# Altium PCB PCB_RGBlimp-Q.pcbdoc (part 1 of 2)
Units mil, origin at the board's own origin, x right, y up, seen from the top; angles counter-clockwise.
Board outline 4269.68 x 4108.26 mil, 2 copper layers (Top Layer, Bottom Layer); 33 components, 48 nets, 199 pads, 83 vias.
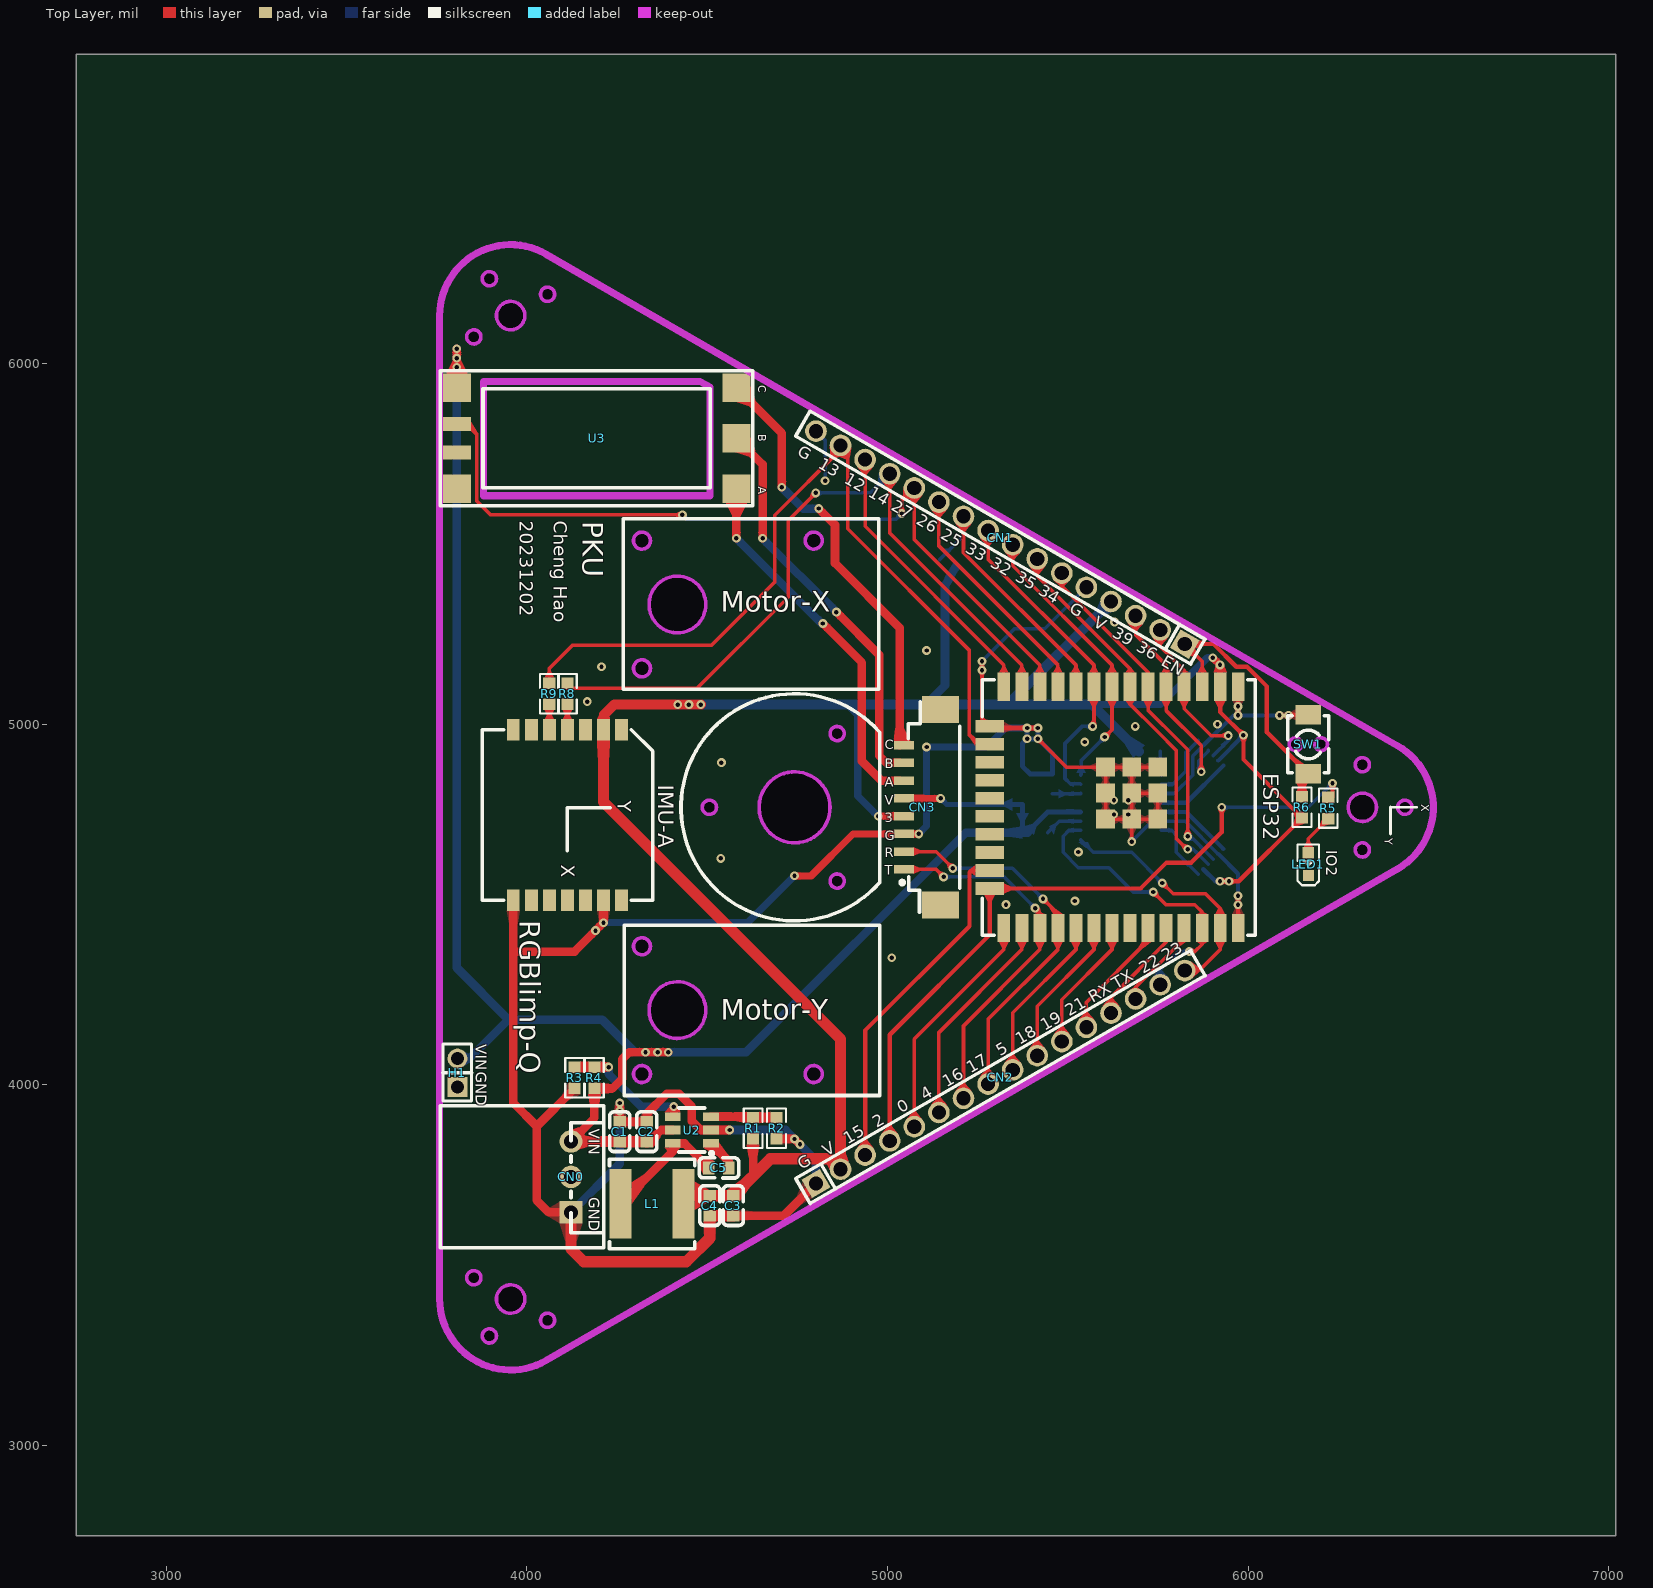
[diagram p0: Top Layer view]
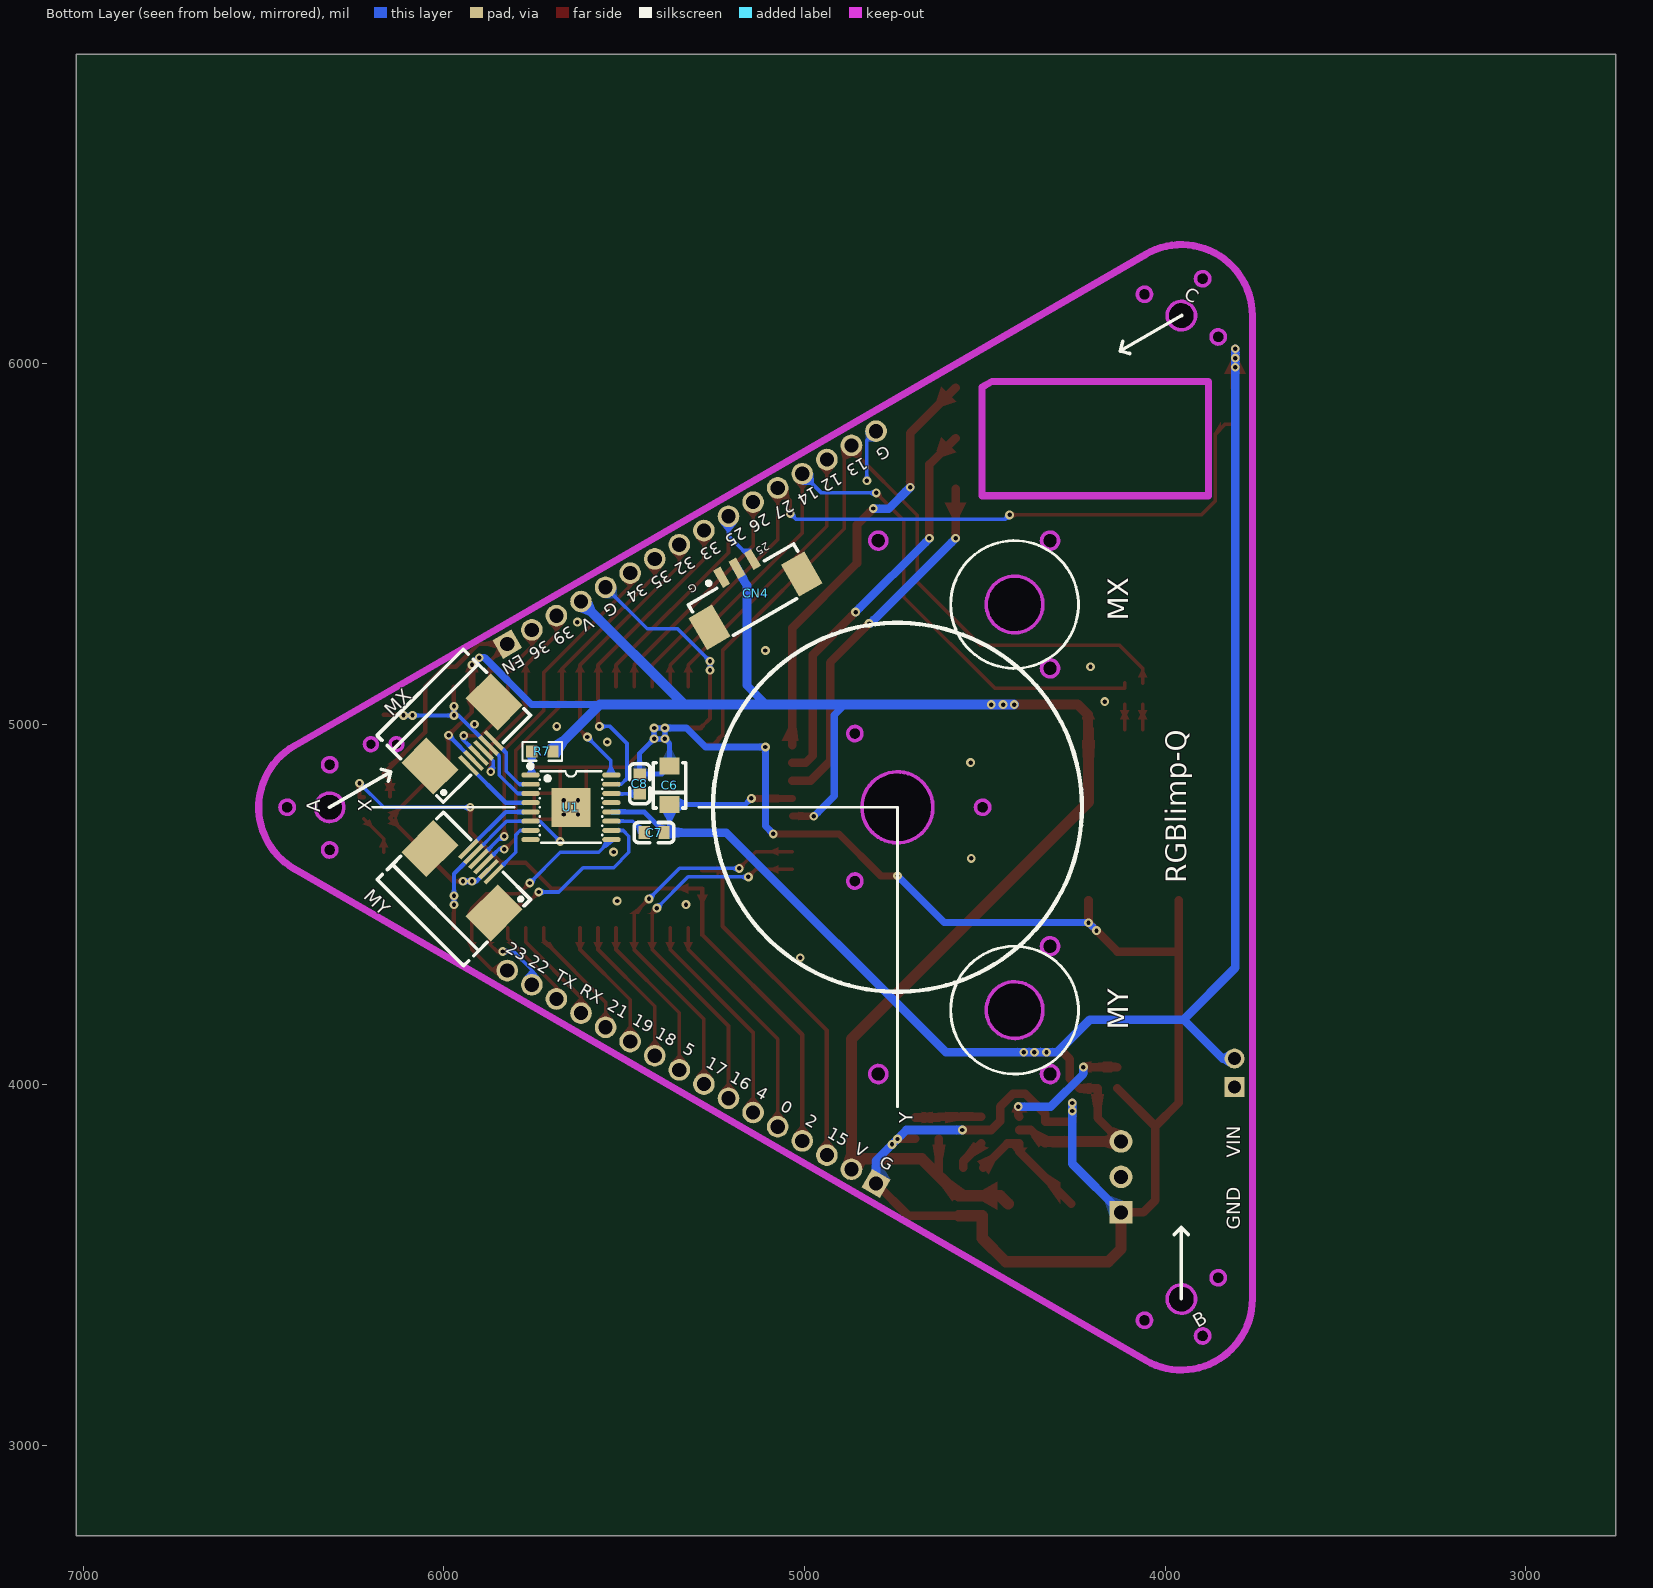
[diagram p1: Bottom Layer view, seen from below]

## Layer stack, top to bottom
Top Layer: signal copper (thickness not stored)
Dielectric: dielectric 12.6, FR-4, Dk 4.8
Bottom Layer: signal copper (thickness not stored)

## Board outline
7019.68,2750 2750,2750 2750,6858.26 7019.68,6858.26
cut-out: 4879.92,4565.11 ccw(c4860.23,4564.87) 4840.55,4565.11 ccw(c4860.23,4565.35)
cut-out: 4879.92,4974.25 ccw(c4860.23,4974.01) 4840.55,4974.25 ccw(c4860.23,4974.49)
cut-out: 4840.55,4769.68 ccw(c4742.12,4769.14) 4643.7,4769.68 ccw(c4742.12,4770.22)
cut-out: 4525.59,4769.68 ccw(c4505.9,4769.44) 4486.22,4769.68 ccw(c4505.9,4769.92)
cut-out: 3994.09,6133.5 ccw(c3954.72,6133.5) 3915.35,6133.5 ccw(c3954.72,6133.5)
cut-out: 3994.09,3405.86 ccw(c3954.72,3405.86) 3915.35,3405.86 ccw(c3954.72,3405.86)
cut-out: 6356.29,4769.68 ccw(c6316.92,4769.68) 6277.55,4769.68 ccw(c6316.92,4769.68)
cut-out: 6336.61,4651.57 ccw(c6316.92,4651.33) 6297.24,4651.57 ccw(c6316.92,4651.81)
cut-out: 3872.12,6074.44 ccw(c3852.43,6074.2) 3832.75,6074.44 ccw(c3852.43,6074.68)
cut-out: 6336.61,4887.79 ccw(c6316.92,4887.55) 6297.24,4887.79 ccw(c6316.92,4888.03)
cut-out: 3872.12,3464.92 ccw(c3852.43,3464.68) 3832.75,3464.92 ccw(c3852.43,3465.16)
cut-out: 4076.7,3346.81 ccw(c4057.01,3346.57) 4037.33,3346.81 ccw(c4057.01,3347.05)
cut-out: 4076.7,6192.55 ccw(c4057.01,6192.31) 4037.33,6192.55 ccw(c4057.01,6192.79)
cut-out: 4496.06,5332.25 ccw(c4417.32,5332.25) 4338.58,5332.25 ccw(c4417.32,5332.25)
cut-out: 4342.51,5155.11 ccw(c4318.89,5155.11) 4295.27,5155.11 ccw(c4318.89,5155.11)
cut-out: 4342.51,5509.44 ccw(c4318.89,5509.44) 4295.27,5509.44 ccw(c4318.89,5509.44)
cut-out: 4818.89,5509.44 ccw(c4795.27,5509.44) 4771.65,5509.44 ccw(c4795.27,5509.44)
cut-out: 4496.06,4207.1 ccw(c4417.32,4207.1) 4338.58,4207.1 ccw(c4417.32,4207.1)
cut-out: 4342.51,4384.25 ccw(c4318.89,4384.25) 4295.27,4384.25 ccw(c4318.89,4384.25)
cut-out: 4342.51,4029.92 ccw(c4318.89,4029.92) 4295.27,4029.92 ccw(c4318.89,4029.92)
cut-out: 4818.89,4029.92 ccw(c4795.27,4029.92) 4771.65,4029.92 ccw(c4795.27,4029.92)
cut-out: 3915.36,6235.82 ccw(c3895.67,6235.58) 3875.99,6235.82 ccw(c3895.67,6236.06)
cut-out: 3915.36,3303.54 ccw(c3895.67,3303.3) 3875.99,3303.54 ccw(c3895.67,3303.78)
cut-out: 6454.72,4769.68 ccw(c6435.03,4769.44) 6415.35,4769.68 ccw(c6435.03,4769.92)

## Design rules (kind name [scope] priority, off if disabled: settings)
Clearance Default [All] p1: gap=7 ignorepadtopadclearanceinfootprint=FALSE except(0: Region-Region; 6: Track-Track Track-SMDPad SMDPad-SMDPad Track-THPad SMDPad-THPad THPad-THPad Track-Via SMDPad-Via THPad-Via Via-Via Track-Fill SMDPad-Fill THPad-Fill Via-Fill Fill-Fill Track-Region SMDPad-Region THPad-Region Via-Region Fill-Region Track-Poly SMDPad-Poly THPad-Poly Via-Poly Fill-Poly Region-Poly Poly-Poly Track-Text SMDPad-Text THPad-Text Via-Text Fill-Text Region-Text Poly-Text Text-Text Track-Sheet SMDPad-Sheet THPad-Sheet Via-Sheet Fill-Sheet Region-Sheet Poly-Sheet Text-Sheet Track-Hole SMDPad-Hole THPad-Hole Via-Hole Fill-Hole Region-Hole Poly-Hole Text-Hole Sheet-Hole)
DiffPairsRouting differentialPair [All] p1: maxuncoupledlength=10 minlimit=6 maxlimit=50 mostfreqgap=6 toplayer_minwidth=5 toplayer_prefwidth=10 toplayer_maxwidth=100 bottomlayer_minwidth=5 bottomlayer_prefwidth=10 bottomlayer_maxwidth=100
PasteMaskExpansion Common [All] p1: expansion=0
PlaneConnect Default [All] p1: planeconnectstyle=Relief reliefexpansion=20 reliefentries=4 reliefconductorwidth=0 reliefairgap=10
PolygonConnect Default [All] p1: connectstyle=Relief reliefentries=4 reliefconductorwidth=0 polygonreliefangle="90 Angle" airgapwidth=10
PolygonConnect gge37914 [All] p1: connectstyle=Relief reliefentries=4 reliefconductorwidth=0 polygonreliefangle="90 Angle" airgapwidth=10
PolygonConnect gge37853 [All] p1: connectstyle=Relief reliefentries=4 reliefconductorwidth=0 polygonreliefangle="90 Angle" airgapwidth=10
RoutingVias Default [All] p1: viastyle="Through Hole" holewidth=12.008 minholewidth=12.008 maxholewidth=2362 width=24.016 minwidth=24.016 maxwidth=3938
SolderMaskExpansion Common [All] p1: useseparateexpansions=TRUE expansion=2 expansionbottom=2
Width Default [All] p1: maxlimit=1000 minlimit=10 preferedwidth=10

## Components (designator, comment, footprint, x,y, rotation, side; value= is the part's Value field where it differs from the comment)
C1 "22uF" C0603 4257.12,3869.68 r270 top
C2 "100nF" C0603 4332.12,3869.68 r270 top
C3 "22uF" C0603 4572.12,3664.68 r270 top
C4 "100nF" C0603 4507.12,3664.68 r270 top
C5 "22nF" C0603 4532.12,3769.68 r180 top
C6 "10uF" CAP-SMD_L3.2-W1.6 5374.01,4830.7 r90 bottom
C7 "10nF" C0603 5417.12,4699.68 r180 bottom
C8 "2.2uF" C0603 5457.12,4834.68 r270 bottom
CN0 "S3B-XH-A (LF)(SN)" CONN-TH_S3B-XH-A-LF-SN-RGBLIMP 4122.08,3744.68 r90 top
CN1 "A2005WV-16P" HDR-TH_16P-P2.00-V-M 5312.99,5517.71 r150 top
CN2 "A2005WV-16P" HDR-TH_16P-P2.00-V-M 5312.99,4021.65 r30 top
CN3 "AFC12-S08CCC-00" CONN-SMD_8P-P1.25-V-M_AFC12-S08CCC-00 5096.43,4769.73 r90 top
CN4 "AFC12-S03CCC-00" CONN-SMD_AFC12-S03CCC-00 5161.41,5387.79 r150 bottom
ESP32 "ESP32-WROOM-32UE(16MB)" WIFI-SMD_ESP32-WROOM-32UE 5627.95,4769.68 r270 top
H1 "A2005WV-2P_C2879963" HDR-TH_2P-P2.00-V-M 3807.09,4033.46 r90 top
IMU-A "HI229" HI229 4112.22,4769.68 r270 top
L1 "10uH" IND-SMD_L6.0-W6.0_SWPA6045S 4347.12,3669.68 r0 top
LED1 "FC-DA1608BK-470H10" LED0603-RD 6167.32,4612.2 r90 top
MX "KH-FG0.5-H2.0-6PIN" FPC-SMD_KH-FG0.5-H2.0-6PIN 5923.22,4946.85 r135 bottom
MY "KH-FG0.5-H2.0-6PIN" FPC-SMD_KH-FG0.5-H2.0-6PIN 5923.22,4592.52 r45 bottom
R1 "68kΩ" R0603 4627.12,3879.68 r90 top
R2 "15kΩ" R0603 4692.12,3879.68 r270 top
R3 "10kΩ" R0603 4132.12,4019.68 r270 top
R4 "20kΩ" R0603 4187.12,4019.68 r270 top
R5 "1kΩ" R0603 6222.43,4767.71 r270 top
R6 "10kΩ" R0603 6149.6,4769.68 r90 top
R7 "47kΩ" R0603 5727.12,4924.68 r0 bottom
R8 "120Ω" R0603 4112.12,5084.68 r270 top
R9 "120Ω" R0603 4062.12,5084.68 r270 top
SW1 "TSA343G00D-250J2" SW-SMD_L4.0-W2.9-P4.15-EH 6167.12,4944.68 r90 top
U1 "DRV8833PWP" TSSOP-16_L5.0-W4.4-P0.65-LS6.4-BL-EP 5647.63,4769.68 r270 bottom
U2 "MT2492" SOT-23-6_L2.9-W1.6-P0.95-LS2.8-BR 4457.12,3874.68 r0 top
U3 "EMAX_ESC_BULLET_6A" EMAX_ESC_BULLET_6A 4625.98,5793.3 r90 top

## Footprints (in the part's own frame and the unit in brackets; to place one, negate y for a bottom-side part, rotate by r counter-clockwise, add the part's x,y. Pads: shape width x height; smd on the part's side, far side on the other; paste and mask are expansions set on the pad)
C0603 [mm]
  rect 0.8x0.9 smd: 1(-0.7,0) 2(0.7,0)
  silkscreen extent -1.41,-0.71 1.39,0.72
CAP-SMD_L3.2-W1.6 [mm]
  rect 1.2x1.4 smd: 1(-1.35,0) 2(1.35,0)
  silkscreen extent -1.6,-1.14 1.6,1.14
CONN-SMD_8P-P1.25-V-M_AFC12-S08CCC-00 [mm]
  rect 0.6x1.4 smd: 1(-4.375,1.297) 2(-3.125,1.297) 3(-1.875,1.297) 4(-0.625,1.297) 5(0.625,1.297) 6(1.875,1.297) 7(3.125,1.297) 8(4.375,1.297)
  rect 1.9x2.6 smd: 9(6.875,-1.297) 10(-6.875,-1.297)
  silkscreen extent -7.4,-2.65 7.45,1.56
CONN-SMD_AFC12-S03CCC-00 [mm]
  rect 0.6x1.4 smd: 1(-1.25,1.309) 2(0,1.309) 3(1.25,1.309)
  rect 1.9x2.6 smd: 4(3.75,-1.309) 5(-3.75,-1.309)
  silkscreen extent -4.25,-2.65 4.32,1.55
CONN-TH_S3B-XH-A-LF-SN-RGBLIMP [mm]
  rect 1.6x1.6 hole 1 copper offset 0.001,0: 1(-2.5,0)
  round 1.6 hole 1: 2(0,0) 3(2.5,0)
  silkscreen extent -5,-2.3 5,9.2
EMAX_ESC_BULLET_6A [mm]
  rect 2x2 smd: A(-3.556,1.143) B(0,1.143) C(3.556,1.143) GND(-3.556,20.828) VIN(3.556,20.828)
  rect 1x2 smd: DGND(-1,20.828) PWM(1,20.828)
  silkscreen extent -4.75,0 4.75,22
FPC-SMD_KH-FG0.5-H2.0-6PIN [mm]
  rect 0.3x1.8 smd: 1(-1.25,-0.95) 2(-0.75,-0.95) 3(-0.25,-0.95) 4(0.25,-0.95) 5(0.75,-0.95) 6(1.25,-0.95)
  rect 2.5x3.2 smd: 7(3.2,0.95) 8(-3.2,0.95)
  silkscreen extent -4.34,-1.53 4.34,5.11
HDR-TH_2P-P2.00-V-M [mm]
  rect 1.4x1.4 hole 0.9: 1(-1,0)
  round 1.4 hole 0.9: 2(1,0)
  silkscreen extent -1.99,-1 2.02,1.03
HDR-TH_16P-P2.00-V-M [mil]
  rect 60x60 hole 39.37: 1(-590.55,0)
  round 60 hole 39.37: 2(-511.81,0) 3(-433.07,0) 4(-354.33,0) 5(-275.59,0) 6(-196.85,0) 7(-118.11,0) 8(-39.37,0) 9(39.37,0) 13(354.33,0) 14(433.07,0) 15(511.81,0) 16(590.55,0)
  round 60 hole 39.37 copper offset 0.01,0: 10(118.11,0)
  round 60 hole 39.37 copper offset 0.01,0.01: 11(196.85,0)
  round 60 hole 39.37 copper offset 0,0.01: 12(275.59,0)
  silkscreen extent -633,-40 633,40
HI229 [mm]
  rect 1.5x0.9 smd: 1(-5.461,3.81) 2(-5.461,2.54) 3(-5.461,1.27) 4(-5.461,0) 5(-5.461,-1.27) 6(-5.461,-2.54) 7(-5.461,-3.81) 8(6.539,-3.81) 9(6.539,-2.54) 10(6.539,-1.27) 11(6.539,0) 12(6.539,1.27) 13(6.539,2.54) 14(6.539,3.81)
  silkscreen extent -5.46,-6 6.54,6
IND-SMD_L6.0-W6.0_SWPA6045S [mm]
  rect 1.55x4.9 smd: 1(-2.225,0) 2(2.225,0)
  silkscreen extent -3,-3.15 3,3.15
LED0603-RD [mm]
  rect 0.8x0.8 smd: 1(-0.799,-0.003) 2(0.799,0.003)
  silkscreen extent -1.49,-0.75 1.39,0.76
R0603 [mil]
  rect 31.75x34.02 smd: 1(-29.66,0) 2(29.66,0)
  silkscreen extent -55,-26 55,26
SOT-23-6_L2.9-W1.6-P0.95-LS2.8-BR [mm]
  rect 1.1x0.6 smd: 1(1.35,-0.95) 2(1.35,0) 3(1.35,0.95) 4(-1.35,0.95) 5(-1.35,0) 6(-1.35,-0.95)
  silkscreen extent -0.9,-1.78 1.52,1.55
SW-SMD_L4.0-W2.9-P4.15-EH [mm]
  rect 1.35x1.8 smd: 1(-2.075,0) 2(2.075,0)
  Multi-Layer board cut-out: 0,0.45 0.222,0.513 0.383,0.677 0.442,0.9 0.383,1.123 0.222,1.287 0,1.35 0,1.35 -0.222,1.287 -0.383,1.123 -0.442,0.9 -0.383,0.677 -0.222,0.513 0,0.45
  Multi-Layer board cut-out: 0,-1.35 0.222,-1.287 0.383,-1.123 0.442,-0.9 0.383,-0.677 0.222,-0.513 0,-0.45 0,-0.45 -0.222,-0.513 -0.383,-0.677 -0.442,-0.9 -0.383,-1.123 -0.222,-1.287 0,-1.35
  Multi-Layer keep-out circle w0.254: c0,0.9 r0.45
  Multi-Layer keep-out circle w0.254: c0,-0.9 r0.45
  silkscreen extent -2,-1.45 2,1.45
TSSOP-16_L5.0-W4.4-P0.65-LS6.4-BL-EP [mm]
  oval 0.35x1.3 smd: 1(-2.275,-2.85) 2(-1.625,-2.85) 3(-0.975,-2.85) 4(-0.325,-2.85) 5(0.325,-2.85) 6(0.975,-2.85) 7(1.625,-2.85) 8(2.275,-2.85) 9(2.275,2.85) 10(1.625,2.85) 11(0.975,2.85) 12(0.325,2.85) 13(-0.325,2.85) 14(-0.975,2.85) 15(-1.625,2.85) 16(-2.275,2.85)
  rect 2.74x2.74 smd: 17(0,0)
  silkscreen extent -3.05,-3.01 2.5,2.2
WIFI-SMD_ESP32-WROOM-32UE [mm]
  rect 2x0.9 smd: 1(-8.5,8.755) 2(-8.5,7.485) 3(-8.5,6.215) 4(-8.5,4.945) 5(-8.5,3.675) 6(-8.5,2.405) 7(-8.5,1.135) 8(-8.5,-0.135) 9(-8.5,-1.405) 10(-8.5,-2.675) 11(-8.5,-3.945) 12(-8.5,-5.215) 13(-8.5,-6.485) 14(-8.5,-7.755) 25(8.5,-7.755) 26(8.5,-6.485) 27(8.5,-5.215) 28(8.5,-3.945) 29(8.5,-2.675) 30(8.5,-1.405) 31(8.5,-0.135) 32(8.5,1.135) 33(8.5,2.405) 34(8.5,3.675) 35(8.5,4.945) 36(8.5,6.215) 37(8.5,7.485) 38(8.5,8.755)
  rect 0.9x2 smd: 15(-5.715,-8.755) 16(-4.445,-8.755) 17(-3.175,-8.755) 18(-1.905,-8.755) 19(-0.635,-8.755) 20(0.635,-8.755) 21(1.905,-8.755) 22(3.175,-8.755) 23(4.445,-8.755) 24(5.715,-8.755)
  rect 1.33x1.33 smd: 39(-2.835,3.09) 39(-2.835,1.255) 39(-2.835,-0.58) 39(-1,3.09) 39(-1,1.255) 39(-1,-0.58) 39(0.835,3.09) 39(0.835,1.255) 39(0.835,-0.58)
  silkscreen extent -9,-9.27 9.02,9.95

## Via types
v1: diameter 24.41, hole 12.2, Top Layer to Bottom Layer, 79 vias
v2: diameter 24, hole 12, Top Layer to Bottom Layer, 4 vias

## Nets (pads, with @x,y where several pads share a name; then routed paths per layer and width w, separated by ;. In a path a pad name is that pad's centre, name@x,y a point inside that pad or via, vN(x,y) a via of type N, cw(c..) or ccw(c..) an arc to the next point about the centre after c; other vN are vias at no path point)
3V3: C3.1 C4.1 CN1.4 CN2.2 CN3.4 CN4.2 ESP32.2 IMU-A.2 L1.2 MX.2 MY.2 R1.1 R6.1 R7.1 | length 6616.1
  Top Layer w11.81: v1(5922.12,4564.68) v1(5947.12,4564.68) 5974.22,4564.68 R6.1@6149.6,4740.02 5987.12,4902.48 v1(5987.12,4969.68) 5922.62,5034.18 ESP32.2@5922.62,5104.38
  Top Layer w19.68: v1(4974.4,4745.07) CN3.4@5033.62,4745.08 ; v1(5902.12,5184.68) v1(5922.12,5164.68) 5922.12,5104.88 ESP32.2@5922.62,5104.38
  Top Layer w23.62: C3.1@4572.12,3692.28 4627.12,3747.28 R1.1@4627.12,3850.02
  Top Layer w27.56: IMU-A.2@4214.22,4964.68 4214.22,5026.78 4242.12,5054.68 v1(4418.23,5054.68) ; v1(4418.23,5054.68) v1(4482.12,5054.68)
  Top Layer w31.5: IMU-A.2@4212.22,4984.68 4212.22,4784.58 4869.72,4127.08 4869.72,3765.78 4840.82,3794.68 4674.52,3794.68 4572.12,3692.28 4507.12,3692.28 4457.32,3692.28 L1.2@4434.72,3669.68
  Bottom Layer w11.81: MY.2@5875.9,4598.09 5909.32,4564.68 v1(5922.12,4564.68) v1(5947.12,4564.68) ; MX.2@5917.62,4899.48 v1(5987.12,4969.68)
  Bottom Layer w19.68: 4888.42,5054.68 4917.32,5025.78 4917.32,4801.18 v1@4974.42,4744.08 ; 5488.82,5054.68 5757.02,5054.68 5887.02,5184.68 v1(5902.12,5184.68) ; v1(5902.12,5184.68) v1(5922.12,5164.68) v1(5902.12,5184.68)
  Bottom Layer w23.62: 5106.42,5054.88 5159.42,5107.88 5159.42,5385.78 CN4.2@5187.18,5432.41
  Bottom Layer w27.56: v1@4419.32,5055.08 5567.42,5054.68 R7.1@5697.42,4924.68 ; 5333.32,5054.68 CN1.4@5619.82,5340.58
  other v1: 4449.14,5054.68
3V3EN: R3.1 R4.1 U2.4 | length 360.4
  Top Layer w23.62: R3.1@4132.12,4049.38 4187.12,4049.38 4187.32,4049.18 v1(4226.37,4049.21) ; U2.4@4403.97,3912.08 4407.12,3915.18 v1(4407.12,3939.68)
  Bottom Layer w23.62: v1(4226.37,4049.21) 4226.37,4030.43 4317.12,3939.68 v1(4407.12,3939.68)
3V3FB: R1.2 R2.1 U2.3 | length 184.6
  Top Layer w23.62: U2.3@4510.22,3912.08 4627.12,3912.08 4627.12,3909.38 R2.1@4692.12,3909.38
BLA: CN3.6 U3.A | length 1028.9
  Top Layer w23.62: v1@4581.02,5515.78 U3.A@4580.98,5653.3 ; v1@4820.82,5279.48 4929.12,5171.28 4929.12,4897.68 4983.22,4843.48 CN3.6@5033.62,4843.48
  Bottom Layer w23.62: v1(4580.98,5515.74) 4817.2,5279.52 v1(4820.86,5279.52)
BLB: CN3.7 U3.B | length 1109.4
  Top Layer w23.62: U3.B@4580.98,5793.3 4653.52,5720.78 v1@4653.52,5515.78 ; v1@4858.22,5310.98 4976.42,5192.88 4976.42,4913.38 4997.02,4892.68 CN3.7@5033.62,4892.68
  Bottom Layer w23.62: v1(4653.54,5515.74) v1(4858.26,5311.02)
BLC: CN3.8 U3.C | length 1204.1
  Top Layer w23.62: U3.C@4580.98,5933.3 4706.72,5807.58 v1(4706.69,5657.47) ; v1@4809.02,5598.38 4854.32,5553.08 4854.32,5446.88 5033.62,5267.58 CN3.8@5033.62,4941.98
  Bottom Layer w23.62: v1(4706.69,5657.47) 4765.74,5598.42 v1(4809.05,5598.42)
EN: CN1.1 ESP32.3 R6.2 SW1.1 | length 774.6
  Top Layer w10: CN1.1@5824.42,5222.44 5872.62,5174.18 ESP32.3@5872.62,5104.38
  Top Layer w11.81: CN1.1@5824.42,5222.48 5904.32,5222.48 5967.12,5159.68 5997.12,5159.68 6052.12,5104.68 6052.12,4977.98 SW1.1@6167.12,4862.99 6149.62,4845.48 R6.2@6149.62,4799.38
GND: C1.1 C2.1 C3.2 C4.2 C6.2 C8.1 CN0.1 CN1.5 CN1.16 CN2.1 CN3.3 CN4.1 ESP32.1 ESP32.15 ESP32.38 ESP32.39 H1.1 IMU-A.8 IMU-A.13 LED1.1 MX.5 MY.5 R2.2 R3.2 SW1.2 U1.3 U1.6 U1.13 U1.17 U2.2 U3.DGND U3.GND | length 8742.3
  Top Layer w10: v1(5262.12,5174.68) v1(5262.12,5149.68) 5262.12,5015.78 ESP32.15@5283.22,4994.68 ; v1(5417.12,4959.68) 5495.52,4881.28 ESP32.39@5605.11,4881.29 ; v1(5677.12,4674.68) ESP32.39@5677.32,4736.78 ; ESP32.39@5749.6,4881.29 ESP32.39@5677.32,4881.28 ; ESP32.39@5605.11,4881.29 ESP32.39@5677.32,4881.28 ; ESP32.39@5605.11,4881.29 ESP32.39@5605.11,4809.05 ESP32.39@5605.11,4736.81 ESP32.39@5677.32,4736.78 ; ESP32.39@5677.32,4736.78 ESP32.39@5749.6,4736.81 ESP32.39@5749.6,4809.05 ESP32.39@5677.32,4809.08 ; ESP32.39@5677.32,4736.78 ESP32.39@5677.32,4809.08 ; ESP32.39@5677.32,4809.08 ESP32.39@5677.32,4881.28
  Top Layer w11.81: v1(5972.12,4524.68) ESP32.38@5972.63,4435.03 ; v1(5972.12,5024.68) ESP32.1@5972.62,5104.38 ; v1(6087.12,5024.68) v1(6112.12,5024.68) 6113.82,5026.38 SW1.2@6167.12,5026.37
  Top Layer w13.78: ESP32.15@5283.22,4994.68 5288.22,4989.68 v1(5387.12,4989.68) v1(5417.12,4989.68)
  Top Layer w19.68: v1(4742.12,4579.68) 4788.32,4579.68 4904.52,4695.88 5033.62,4695.88 v1(5086.61,4695.86)
  Top Layer w23.62: 3962.22,4370.78 3962.22,4369.68 4132.12,4369.68 v1(4190.1,4427.66) v1(4212.22,4449.78) IMU-A.13@4212.22,4512.28 ; IMU-A.8@3962.22,4512.28 3962.22,3949.88 4027.12,3884.98 ; CN0.1@4122.12,3646.28 4060.42,3646.28 4027.12,3679.58 4027.12,3884.98 ; R3.2@4132.12,3990.02 4027.12,3884.98 ; v1(4257.12,3927.51) v1(4257.12,3949.68) 4257.12,3897.28 4332.12,3897.28 4332.12,3919.68 4387.12,3974.68 4422.12,3974.68 4457.12,3939.68 4457.12,3899.68 4482.12,3874.68 4510.22,3874.68 v1(4562.12,3874.68) ; C3.2@4572.12,3637.12 4712.32,3637.08 CN2.1@4801.52,3726.38 ; R2.2@4692.12,3850.02 4741.82,3849.98 v1(4742.12,3849.68) v1(4757.12,3834.68)
  Top Layer w31.5: CN0.1@4122.12,3646.28 4122.12,3544.68 4157.12,3509.68 4442.12,3509.68 4507.12,3574.68 C4.2@4507.12,3637.12 C3.2@4572.12,3637.12
  Bottom Layer w10: CN1.16@4801.52,5812.98 4826.77,5787.73 v1(4826.77,5675.19) ; v1(5262.12,5149.68) v1(5262.12,5174.68) 5352.12,5264.68 5436.42,5264.68 CN1.5@5551.62,5379.88 ; v1(5677.12,4674.68) 5733.72,4731.28 U1.6@5759.84,4731.29 5826.22,4731.28 MY.5@5917.62,4639.88 ; U1.3@5759.84,4808.07 5795.52,4808.08 5846.42,4858.98 5846.42,4911.78 MX.5@5875.9,4941.28
  Bottom Layer w11.81: MX.5@5875.9,4941.28 5959.32,5024.68 v1(5972.12,5024.68) ; MY.5@5917.62,4639.88 5972.12,4585.38 v1(5972.12,4499.68) ; v1(5972.12,5049.68) v1(5972.12,5024.68) ; v1(6112.12,5024.68) v1(5972.12,5024.68)
  Bottom Layer w13.78: v1(5387.12,4959.68) 5374.02,4946.58 C6.2@5374.01,4883.86 5395.62,4862.28 5457.12,4862.28 5457.12,4919.68 v1(5417.12,4959.68) ; v1(5387.12,4959.68) v1(5417.12,4959.68) ; v1(5387.12,4959.68) v1(5387.12,4989.68) v1(5417.12,4989.68) v1(5417.12,4959.68)
  Bottom Layer w19.68: v1(4190.1,4427.66) v1(4212.22,4449.78) 4612.22,4449.78 v1(4742.12,4579.68) ; v1(5086.61,4695.86) 5108.26,4717.52 v1(5108.26,4937) 5274.44,4937 5327.12,4989.68 v1(5387.12,4989.68)
  Bottom Layer w23.62: CN0.1@4122.12,3646.28 4257.12,3781.28 v1(4257.12,3949.68) ; v1(4562.12,3874.68) 4717.12,3874.68 v1(4757.12,3834.68) v1(4742.12,3849.68) 4801.52,3790.28 CN2.1@4801.52,3726.38
  other v1: 5011.81,4352.36 5328.73,4499.99 5519.68,4509.84 4537.4,4627.95 5529.52,4645.66 4539.37,4893.69 5547.24,4950.78 5687,4994.09 5915.35,4999.99 4167.32,5062.99 4206.69,5159.44 5108.26,5204.72 5629.91,5283.46
IMU-A_4: IMU-A.4 R8.2 | length 70.3
  Top Layer w10: R8.2@4112.12,5055.02 IMU-A.4@4112.22,4984.68
IMU-A_5: IMU-A.5 R9.2 | length 70.3
  Top Layer w10: R9.2@4062.12,5055.02 IMU-A.5@4062.22,4984.68
IO0: CN2.5 ESP32.25 | length 653.9
  Top Layer w10: CN2.5@5074.32,3883.86 5074.32,4126.88 5322.62,4375.18 ESP32.25@5322.63,4435.03
IO2: CN2.4 ESP32.24 R5.1 | length 1978.2
  Top Layer w11.81: CN2.4@5006.12,3844.49 5006.12,4138.68 5283.22,4415.78 5283.22,4544.68 5702.12,4544.68 5773.62,4616.18 5842.52,4616.18 5927.12,4700.78 v1@5927.12,4769.68 ; R5.1@6222.43,4797.37 6234.22,4797.38 v1(6234.24,4836.61)
  Bottom Layer w10: v1(5927.16,4769.68) 6167.31,4769.68 v1(6234.24,4836.61)
IO4: CN2.6 ESP32.26 | length 607.1
  Top Layer w10: CN2.6@5142.51,3923.23 5142.52,4145.08 5372.62,4375.18 ESP32.26@5372.63,4435.03
IO5: CN2.9 ESP32.29 | length 466.3
  Top Layer w10: CN2.9@5347.12,4041.38 5347.12,4199.68 5522.62,4375.18 ESP32.29@5522.63,4435.03
IO12: CN1.14 ESP32.14 | length 789.2
  Top Layer w10: CN1.14@4937.92,5734.28 4937.92,5548.88 5322.62,5164.18 ESP32.14@5322.62,5104.38
IO13: CN1.15 ESP32.16 R9.1 | length 2237.6
  Top Layer w10: R9.1@4062.12,5114.38 4062.12,5154.68 4127.12,5219.68 4512.12,5219.68 4687.12,5394.68 4687.12,5579.68 4869.72,5762.28 CN1.15@4869.75,5773.62 4889.72,5753.58 4889.72,5542.08 5227.12,5204.68 5227.12,4969.68 5252.12,4944.68 ESP32.16@5283.22,4944.68
IO14: CN1.13 ESP32.13 R8.1 | length 2022.1
  Top Layer w10: R8.1@4112.12,5114.38 4112.12,5099.68 4471.72,5099.68 4724.42,5352.38 4724.42,5564.98 v1(4801.18,5641.72) ; CN1.13@5006.13,5694.88 5006.12,5530.68 5372.62,5164.18 ESP32.13@5372.62,5104.38
  Bottom Layer w10: v1(4801.18,5641.72) 4952.97,5641.72 CN1.13@5006.13,5694.88
IO15: CN2.3 ESP32.23 | length 962.6
  Top Layer w11.81: CN2.3@4937.93,3805.12 4937.92,4150.48 5227.12,4439.68 5227.12,4589.68 5232.12,4594.68 ESP32.23@5283.22,4594.68
IO16: CN2.7 CN3.1 ESP32.27 | length 1041.1
  Top Layer w10: CN3.1@5033.62,4597.48 5134.82,4597.48 v1(5155.51,4576.77) ; CN2.7@5210.7,3962.6 5210.72,4163.28 5422.62,4375.18 ESP32.27@5422.63,4435.03 5422.62,4476.98 v1(5409.44,4490.15)
  Bottom Layer w10: v1(5155.51,4576.77) 5322.83,4576.77 v1(5409.44,4490.15)
IO17: CN2.8 CN3.2 ESP32.28 | length 1062.9
  Top Layer w10: CN3.2@5033.62,4646.68 5134.82,4646.68 v1(5181.1,4600.39) ; CN2.8@5278.89,4001.97 5278.92,4181.48 5472.62,4375.18 ESP32.28@5472.63,4435.03 5472.62,4474.18 v1@5431.12,4515.78
  Bottom Layer w10: v1(5181.1,4600.39) 5346.46,4600.38 v1(5431.1,4515.74)
IO18: CN2.10 ESP32.30 | length 419.5
  Top Layer w10: CN2.10@5415.27,4080.71 5415.32,4217.88 5572.62,4375.18 ESP32.30@5572.63,4435.03
IO19: CN2.11 ESP32.31 | length 372.6
  Top Layer w10: CN2.11@5483.42,4120.08 5483.42,4235.98 5622.62,4375.18 ESP32.31@5622.63,4435.03
IO21: CN2.12 ESP32.33 | length 346.3
  Top Layer w10: CN2.12@5551.62,4159.48 5551.62,4229.18 5722.62,4400.18 ESP32.33@5722.63,4435.03
IO22: CN2.15 ESP32.36 U1.10 | length 830.2
  Top Layer w10: v1(5737.12,4534.68) 5772.12,4499.68 5852.12,4499.68 5872.62,4479.18 ESP32.36@5872.63,4435.03 5872.62,4390.18 5852.12,4369.68 v1(5837.12,4369.68)
  Bottom Layer w10: U1.10@5535.43,4705.7 5503.12,4705.68 5487.12,4689.68 5487.12,4644.68 5529.42,4602.38 5614.12,4602.38 5681.82,4534.68 v1(5737.12,4534.68) ; CN2.15@5756.23,4277.56 5756.22,4318.78 5807.12,4369.68 v1(5837.12,4369.68)
IO23: CN2.16 ESP32.37 U1.9 | length 702.6
  Top Layer w10: v1(5762.12,4559.68) 5792.12,4529.68 5882.12,4529.68 5922.62,4489.18 ESP32.37@5922.63,4435.03 5922.62,4375.18 5867.12,4319.68 5827.12,4319.68 CN2.16@5824.42,4316.98
  Bottom Layer w10: U1.9@5535.43,4680.11 5570.82,4644.68 5677.12,4644.68 v1(5762.12,4559.68)
IO25: CN1.10 CN4.3 ESP32.10 | length 748.8
  Top Layer w10: CN1.10@5210.7,5576.76 5210.72,5476.08 5522.62,5164.18 ESP32.10@5522.62,5104.38
  Bottom Layer w10: CN4.3@5144.52,5456.98 5210.72,5523.18 CN1.10@5210.7,5576.76
IO26: CN1.11 ESP32.11 | length 648.5
  Top Layer w10: CN1.11@5142.52,5616.18 5142.52,5494.28 5472.62,5164.18 ESP32.11@5472.62,5104.38
IO27: CN1.12 ESP32.12 U3.PWM | length 2238.2
  Top Layer w10: U3.PWM@3805.98,5832.67 3832.72,5832.68 3860.22,5805.08 3860.22,5620.08 3899.62,5580.68 v1(4431.1,5580.7) ; v1(5039.36,5584.64) 5039.36,5620.54 CN1.12@5074.32,5655.51 5074.32,5512.48 5422.62,5164.18 ESP32.12@5422.62,5104.38
  Bottom Layer w10: v1(4431.1,5580.7) 4442.92,5568.88 5023.52,5568.88 v1@5039.32,5584.68
IO32: CN1.8 ESP32.8 U1.16 | length 788.9
  Top Layer w10: CN1.8@5347.08,5498.03 5347.12,5439.68 5622.62,5164.18 5622.62,5104.38 5622.62,4985.18 v1(5602.12,4964.68)
  Bottom Layer w10: U1.16@5535.43,4859.25 5537.12,4860.98 5537.12,4899.68 v1(5602.12,4964.68)
IO33: CN1.9 ESP32.9 U1.15 | length 910
  Top Layer w10: CN1.9@5278.89,5537.4 5278.92,5457.88 5572.62,5164.18 5572.62,5104.38 5572.62,4997.78 v1(5568.89,4994.09)
  Bottom Layer w10: U1.15@5535.43,4833.66 5534.42,4834.68 5507.12,4834.68 5492.12,4849.68 5492.12,4914.68 5492.12,4946.88 5539.32,4994.08 v1(5568.89,4994.09)
IO34: CN1.6 ESP32.6 MY.4 | length 972.1
  Top Layer w10: CN1.6@5483.42,5419.28 5483.42,5383.38 5722.62,5144.18 5722.62,5104.38 5722.62,5039.18 5765.72,4996.08 ; 5765.74,4996.06 5832.67,4929.13 v1(5832.67,4688.97)
  Bottom Layer w10: v1(5832.67,4688.97) 5840.72,4688.98 MY.4@5903.74,4625.93
IO35: CN1.7 ESP32.7 MY.3 | length 1053.5
  Top Layer w10: CN1.7@5415.27,5458.66 5415.32,5411.48 5672.62,5154.18 5672.62,5104.38 5672.62,5055.68 5748.02,4980.28 5801.18,4927.16 5801.18,4683.07 5830.7,4653.54 v1(5832.67,4653.54)
  Bottom Layer w10: v1@5832.72,4653.58 5848.22,4653.58 MY.3@5889.82,4612.01
IO36: CN1.2 ESP32.4 MX.3 | length 471.3
  Top Layer w10: CN1.2@5756.23,5261.8 5756.22,5215.58 5822.62,5149.18 5822.62,5104.38 5822.62,5043.48 5897.62,4968.48 v1(5944.92,4968.5)
  Bottom Layer w10: MX.3@5903.72,4913.48 5944.92,4954.68 v1(5944.92,4968.5)
IO39: CN1.3 ESP32.5 MX.4 | length 581.7
  Top Layer w10: CN1.3@5688.04,5301.17 5688.02,5248.78 5772.62,5164.18 5772.62,5104.38 5772.62,5038.38 5870.02,4940.98 v1@5870.02,4868.08
  Bottom Layer w10: 5863.12,4898.58 5889.82,4925.28 MX.4@5889.81,4927.36 ; 5863.17,4898.61 5863.17,4875.01 v1(5870.07,4868.1)
L1_1: C5.2 L1.1 U2.6 | length 356
  Top Layer w23.62: L1.1@4259.52,3669.68 4404.02,3814.18 U2.6@4403.97,3837.28 4436.92,3837.28 C5.2@4504.52,3769.68
MX_M+: MX.6 U1.2 | length 182.2
  Bottom Layer w10: U1.2@5759.84,4833.66 5791.12,4833.68 5827.12,4869.68 5827.12,4920.38 MX.6@5861.98,4955.2
MX_M-: MX.1 U1.4 | length 215
  Bottom Layer w11.81: U1.4@5759.32,4782.48 5828.42,4782.48 MX.1@5931.57,4885.6
MY_M+: MY.1 U1.7 | length 180.6
  Bottom Layer w10: U1.7@5759.84,4705.7 5788.42,4705.68 5801.22,4692.88 5801.22,4644.98 MY.1@5861.98,4584.17
MY_M-: MY.6 U1.5 | length 214.9
  Bottom Layer w11.81: U1.5@5759.32,4756.88 5828.42,4756.88 MY.6@5931.52,4653.78
N/C: IMU-A.7
R5_2: LED1.2 R5.2 | length 115.3
  Top Layer w10: LED1.2@6167.12,4645.68 6167.12,4682.78 R5.2@6222.43,4738.05
U0_RXD: CN2.13 ESP32.34 | length 299.5
  Top Layer w10: CN2.13@5619.84,4198.82 5619.82,4242.38 5772.62,4395.18 ESP32.34@5772.63,4435.03
U0_TXD: CN2.14 ESP32.35 | length 252.6
  Top Layer w10: CN2.14@5688.03,4238.19 5688.02,4270.58 5822.62,4405.18 ESP32.35@5822.63,4435.03
U1_1: R7.2 U1.1 | length 66.6
  Bottom Layer w10: R7.2@5756.78,4924.68 5756.82,4862.28 U1.1@5759.84,4859.25
U1_11: C7.1 U1.11 | length 103.8
  Bottom Layer w10: C7.1@5444.68,4699.68 5476.32,4731.28 U1.11@5535.43,4731.29
U1_14: C8.2 U1.14 | length 78.7
  Bottom Layer w10: C8.2@5457.12,4807.12 5534.42,4807.08 U1.14@5535.43,4808.07
U2_1: C5.1 U2.1 | length 88.1
  Top Layer w23.62: U2.1@4510.22,3837.28 4559.72,3787.88 C5.1@4559.68,3769.68
VIN: C1.2 C2.2 C6.1 C7.2 CN0.3 CN3.5 H1.2 R4.2 U1.12 U2.5 U3.VIN | length 5358.3
  Top Layer w19.68: CN3.5@5033.62,4794.28 v1(5147.12,4794.29)
  Top Layer w23.62: v1@3805.12,6041.38 U3.VIN@3805.98,5933.3 ; CN0.3@4122.08,3843.11 4187.12,3908.18 R4.2@4187.12,3990.02 4237.42,3989.98 4263.82,4016.38 4263.82,4070.88 4283.42,4090.58 v1(4391.9,4090.58) ; C2.2@4332.12,3842.12 4339.52,3842.08 4372.12,3874.68 U2.5@4403.97,3874.68
  Top Layer w31.5: CN0.3@4122.08,3843.11 C2.2@4332.12,3842.12
  Bottom Layer w13.78: v1(5147.12,4794.29) 5163.82,4777.58 C6.1@5374.01,4777.55 5374.02,4715.28 5389.52,4699.68 5389.52,4702.08 5444.32,4756.88 U1.12@5535.43,4756.88
  Bottom Layer w23.62: v1(3805.11,6041.33) 3805.11,4324.81 3948.82,4180.68 4208.66,4180.68 4299.12,4090.55 v1(4391.9,4090.58) ; H1.2@3807.08,4072.83 3840.55,4072.83 3948.82,4181.1 ; v1(4328.74,4090.55) v1(4362.2,4090.55) ; v1(4362.2,4090.55) v1(4391.9,4090.58) ; C7.2@5389.52,4699.68 5217.42,4699.68 4608.32,4090.58 v1(4391.9,4090.58)
  other v1: 3805.11,5990.15 3805.11,6015.74
pads on no net: CN0.2 CN3.9 CN3.10 CN4.4 CN4.5 ESP32.17 ESP32.18 ESP32.19 ESP32.20 ESP32.21 ESP32.22 ESP32.32 IMU-A.1 IMU-A.3 IMU-A.6 IMU-A.9 IMU-A.10 IMU-A.11 IMU-A.12 IMU-A.14 MX.7 MX.8 MY.7 MY.8 U1.8
copper on no net:
  other v2: 5627.95,4749.99 5667.32,4749.99 5627.95,4789.36 5667.32,4789.36

## Polygon pours and split planes (outlines as drawn)
GND on Top Layer (solid, remove dead copper, pour order 0): 3003.94,6608.26 6763.77,6608.26 6763.77,3013.78 6769.68,3007.87 3013.78,3007.87 3003.94,3017.72 3003.94,4978.34
GND on Bottom Layer (solid, remove dead copper, pour order 2): 3000,6600.39 6757.87,6600.39 6761.8,6604.32 6761.8,3003.94 3009.84,3003.94 3005.91,3000

## Keep-outs
Board Outline Layer:
  lines w19.68: 3757.87,3405.87 3757.87,6133.5 cw(c3954.72,6133.5) 4053.15,6303.98 4053.15,6303.97 6415.35,4940.16 ; 3757.87,3405.87 3757.87,3405.86 ; 3757.87,3405.87 ccw(c3954.72,3405.87) 4053.15,3235.39 ; 4053.15,3235.39 4053.15,3235.39 ; 4053.15,3235.39 6415.35,4599.2 ccw(c6316.92,4769.68) 6415.35,4940.16 ; 6415.35,4940.16 6415.35,4940.16 ; 3879.92,5633.88 4507.87,5633.88 4507.87,5935.03 4480.31,5950.78 3879.92,5950.78 3879.92,5633.88
Multi-Layer:
  circle w10: c4860.23,4565.11 r19.68
  circle w10: c4860.23,4974.25 r19.68
  circle w10: c4742.12,4769.68 r98.42
  circle w10: c4505.9,4769.68 r19.68
  circle w10: c3954.72,6133.5 r39.37
  circle w10: c3954.72,3405.86 r39.37
  circle w10: c6316.92,4769.68 r39.37
  circle w10: c6316.92,4651.57 r19.68
  circle w10: c3852.43,6074.44 r19.68
  circle w10: c6316.92,4887.79 r19.68
  circle w10: c3852.43,3464.92 r19.68
  circle w10: c4057.01,3346.81 r19.68
  circle w10: c4057.01,6192.55 r19.68
  circle w10: c4417.32,5332.25 r78.74
  circle w10: c4318.89,5155.11 r23.62
  circle w10: c4318.89,5509.44 r23.62
  circle w10: c4795.27,5509.44 r23.62
  circle w10: c4417.32,4207.1 r78.74
  circle w10: c4318.89,4384.25 r23.62
  circle w10: c4318.89,4029.92 r23.62
  circle w10: c4795.27,4029.92 r23.62
  circle w10: c3895.67,6235.82 r19.68
  circle w10: c3895.67,3303.54 r19.68
  circle w10: c6435.03,4769.68 r19.68

## Other copper
Top Layer:
  region net VIN: 4120.12,3874.54 4153.52,3841.12 4160.76,3865.06 4144.06,3881.77
  region net VIN: 4143.04,3866.62 4142.79,3819.37 4164.88,3827.13 4165.04,3858.63
  region net IO13: 4899.07,5767.31 4859.82,5745.3 4884.72,5735.19 4894.72,5740.79
  region net IO13: 4877.45,5744.62 4840.01,5769.59 4842.83,5742.47 4851.32,5736.81
  region net IO12: 4960.43,5714.39 4915.43,5714.4 4932.92,5693.4 4942.92,5693.4
  region net IO14: 5028.62,5675.03 4983.62,5675.03 5001.12,5654.03 5011.12,5654.03
  region net IO27: 5096.82,5635.66 5051.82,5635.66 5069.32,5614.66 5079.32,5614.66
  region net IO27: 5044.38,5657.38 5076.2,5625.56 5048.98,5623.09 5041.91,5630.16
  region net IO26: 5165.01,5596.3 5120.01,5596.28 5137.52,5575.29 5147.52,5575.29
  region net IO25: 5233.21,5556.94 5188.21,5556.9 5205.72,5535.92 5215.72,5535.92
  region net IO33: 5301.41,5517.56 5256.41,5517.53 5273.92,5496.55 5283.92,5496.55
  region net IO32: 5369.6,5478.2 5324.6,5478.16 5342.12,5457.17 5352.12,5457.18
  region net IO35: 5437.8,5438.84 5392.8,5438.78 5410.32,5417.8 5420.32,5417.81
  region net IO34: 5505.94,5399.41 5460.94,5399.46 5478.42,5383.39 5488.42,5383.38
  region net IO39: 5710.53,5281.32 5665.53,5281.33 5683.02,5260.33 5693.02,5260.33
  region net IO36: 5778.72,5241.96 5733.72,5241.96 5751.22,5220.96 5761.22,5220.96
  region net U0_TXD: 5710.53,4258.05 5665.53,4258.02 5683.02,4270.58 5693.02,4270.59
  region net U0_RXD: 5642.34,4218.68 5597.34,4218.65 5614.82,4239.66 5624.82,4239.67
  region net IO21: 5574.14,4179.31 5529.14,4179.28 5546.62,4200.29 5556.62,4200.3
  region net IO19: 5505.95,4139.95 5460.95,4139.9 5478.42,4160.92 5488.42,4160.93
  region net IO18: 5437.8,4100.53 5392.8,4100.58 5410.32,4121.56 5420.32,4121.55
  region net IO5: 5369.6,4061.16 5324.6,4061.21 5342.12,4082.19 5352.12,4082.18
  region net IO17: 5301.41,4021.8 5256.41,4021.83 5273.92,4042.82 5283.92,4042.81
  region net IO16: 5233.21,3982.43 5188.21,3982.46 5205.72,4003.45 5215.72,4003.44
  region net IO4: 5165.02,3943.07 5120.02,3943.08 5137.52,3964.08 5147.52,3964.07
  region net IO0: 5096.82,3903.7 5051.82,3903.7 5069.32,3924.7 5079.32,3924.7
  region net IO2: 5028.63,3864.34 4983.63,3864.33 5000.22,3885.33 5012.03,3885.34
  region net IO15: 4960.43,3824.98 4915.43,3824.95 4932.02,3845.96 4943.83,3845.97
  region net 3V3: 4839.81,3763.87 4871.63,3795.69 4852.01,3805.77 4829.74,3783.5
  region net 3V3: 4892.24,3785.61 4847.24,3785.58 4853.97,3806.58 4885.47,3806.61
  region net IO23: 5845.73,4295.82 5842.71,4340.72 5864.84,4324.68 5865.51,4314.68
  region net 3V3: 5987.89,4981.86 5974.94,4968.92 5971.2,4977.26 5979.55,4985.61
  region net 3V3: 5977.97,4961.61 5996.28,4961.61 5993.03,4953.07 5981.22,4953.07
  region net 3V3: 5912.97,5156.61 5931.28,5156.61 5931.96,5148.07 5912.28,5148.07
  region net 3V3: 5922.89,5176.86 5909.94,5163.92 5903.41,5169.47 5917.33,5183.39
  region net 3V3: 5914.3,5185.45 5901.36,5172.5 5906.91,5165.97 5920.83,5179.89
  region net 3V3: 5930.19,4555.53 5930.19,4573.84 5938.74,4570.59 5938.74,4558.78
  region net 3V3: 5939.05,4555.53 5939.05,4573.84 5930.51,4570.59 5930.51,4558.78
  region net 3V3: 5955.19,4555.53 5955.19,4573.84 5963.74,4570.59 5963.74,4558.78
  region net IO2: 5936.3,4761.59 5917.99,4761.63 5921.22,4753.08 5933.03,4753.05
  region net IO2: 6243.39,4828.53 6225.08,4828.55 6228.32,4820 6240.13,4819.99
  region net VIN: 4370.29,4081.41 4370.26,4099.72 4378.8,4102.39 4378.84,4078.77
  region net VIN: 4354.15,4099.72 4354.11,4081.41 4345.56,4078.77 4345.61,4102.39
  region net VIN: 4336.83,4081.41 4336.8,4099.72 4345.34,4102.39 4345.38,4078.77
  region net VIN: 4320.69,4099.72 4320.65,4081.41 4312.1,4078.77 4312.15,4102.39
  region net 3V3EN: 4397.97,3931.61 4416.28,3931.61 4418.93,3923.07 4395.31,3923.07
  region net 3V3EN: 4218.32,4040.04 4218.28,4058.35 4209.74,4060.99 4209.78,4037.37
  region net IO22: 5845.19,4360.53 5845.19,4378.84 5852.12,4374.68 5852.12,4364.68
  region net IO14: 4801.98,5629.54 4789,5642.45 4785.92,5633.47 4793.01,5626.42
  region net IO33: 5561.78,5004.01 5579.62,4999.9 5577.62,5009.13 5567.62,5011.44
  region net IO32: 5614.3,4963.92 5601.36,4976.86 5610.34,4979.97 5617.41,4972.9
  region net IO23: 5774.3,4560.45 5761.36,4547.5 5770.34,4544.4 5777.41,4551.47
  region net IO22: 5749.3,4535.45 5736.36,4522.5 5745.34,4519.4 5752.41,4526.47
  region net VIN: 5139.05,4785.13 5139.04,4803.44 5130.5,4804.12 5130.51,4784.44
  region net 3V3: 4982.48,4735.92 4982.47,4754.23 4991.01,4754.92 4991.02,4735.24
  region net VIN: 3814.44,6007.87 3796.14,6007.47 3793.66,5998.87 3817.28,5999.39
  region net VIN: 3814.31,6023.77 3796,6023.86 3793.39,6032.42 3817.01,6032.3
  region net VIN: 3814.54,5982.4 3796.24,5981.77 3793.88,5973.14 3817.49,5973.95
  region net VIN: 3814.41,5998.06 3796.11,5998.39 3793.6,6006.98 3817.22,6006.56
  region net IO27: 4423.04,5571.54 4423.02,5589.85 4414.48,5585.68 4414.49,5575.68
  region net IO27: 5030.21,5592.72 5048.52,5592.72 5044.36,5601.26 5034.36,5601.26
  region net BLC: 4821.24,5599.15 4808.25,5586.24 4812.39,5578.31 4829.14,5594.96
  region net BLB: 4870.45,5311.75 4857.46,5298.84 4861.6,5290.91 4878.35,5307.56
  region net BLA: 4833.05,5280.25 4820.06,5267.34 4824.2,5259.41 4840.95,5276.07
  region net BLA: 4590.15,5523.79 4571.85,5523.84 4569.21,5532.39 4592.83,5532.33
  region net BLB: 4662.69,5523.83 4644.38,5523.8 4641.71,5532.34 4665.33,5532.37
  region net BLC: 4715.86,5665.53 4697.55,5665.56 4694.91,5674.11 4718.53,5674.07
  region net IO17: 5181.87,4612.57 5168.92,4599.63 5165.82,4608.61 5172.89,4615.68
  region net IO16: 5156.29,4588.95 5143.33,4576.02 5140.23,4585 5147.31,4592.06
  region net IO16: 5421.62,4490.92 5408.68,4477.97 5417.66,4474.87 5424.73,4481.95
  region net IO17: 5443.28,4516.52 5430.35,4503.56 5439.34,4500.47 5446.4,4507.55
  region net IO36: 5936.86,4959.34 5936.83,4977.65 5928.3,4973.48 5928.31,4963.48
  region net IO39: 5879.2,4876.2 5860.89,4876.15 5865.02,4884.7 5875.02,4884.73
  region net IO34: 5823.52,4697.04 5841.83,4697.04 5837.67,4705.59 5827.67,4705.59
  region net IO35: 5832.41,4665.74 5820.6,4651.76 5816.74,4660.43 5823.22,4668.1
  region net VIN: 3814.34,6033.34 3796.03,6033.18 3793.45,6024.61 3817.07,6024.82
  region net VIN: 4383.83,4081.43 4383.83,4099.74 4375.29,4102.39 4375.29,4078.77
  region net R5_2: 6154.62,4659.42 6179.62,4659.42 6172.12,4674.42 6162.12,4674.42
  region net BLC: 5017.81,4953.79 5063.15,4953.79 5045.43,4989.22 5021.81,4989.22
  region net VIN: 5072.93,4806.15 5072.93,4782.53 5102.46,4784.44 5102.46,4804.12
  region net 3V3: 5017.81,4733.31 5017.81,4756.93 4988.29,4754.92 4988.29,4735.24
  region net IO17: 5072.93,4658.51 5072.93,4634.89 5087.93,4641.68 5087.93,4651.68
  region net IO16: 5072.93,4609.3 5072.93,4585.68 5087.93,4592.48 5087.93,4602.48
  region net BLA: 4610.55,5613.93 4551.49,5613.93 4569.21,5578.5 4592.83,5578.5
  region net BLB: 4620.35,5795.74 4578.64,5753.93 4616.2,5741.4 4632.88,5758.13
  region net BLC: 4620.35,5935.74 4578.64,5893.93 4616.2,5881.4 4632.88,5898.13
  region net VIN: 3776.17,5972.67 3835.22,5972.67 3817.21,6008.11 3793.59,6008.11
  region net IO27: 3845.35,5837.99 3845.24,5812.99 3860.17,5798.05 3860.23,5812.15
  region net VIN: 4314.4,3826.37 4336.6,3857.87 4278.95,3858.08 4256.83,3826.69
  region net VIN: 4323.15,3857.87 4349.84,3826.37 4370.7,3856.56 4355.38,3874.65
  region net 3V3: 4554.4,3707.99 4589.84,3676.49 4617.36,3715.24 4593.77,3736.21
  region net 3V3: 4554.4,3707.99 4589.84,3676.49 4606.04,3709.5 4588.36,3725.22
  region net L1_1: 4488.81,3751.96 4520.31,3787.4 4487.31,3803.6 4471.58,3785.92
  region net U2_1: 4543.93,3787.4 4575.43,3787.4 4571.53,3787.88 4547.91,3787.88
  region net EN: 5865.42,5233.38 5851.73,5209.7 5876.17,5216.58 5883,5228.39
  region net EN: 5852.63,5211.25 5840.12,5189.61 5854.76,5184.97 5859.94,5193.93
  region net EN: 6131.69,4889.56 6155.3,4889.56 6131.18,4907.28 6114.47,4907.28
  region net EN: 6164.39,4836.41 6134.86,4836.41 6143.72,4818.7 6155.53,4818.7
  region net 3V3: 4194.5,5014.21 4229.94,5014.21 4228,5026.78 4200.44,5026.78
  region net 3V3: 4229.94,4955.15 4194.5,4955.15 4196.47,4907.91 4227.97,4907.91
  region net IMU-A_4: 4099.68,5014.21 4124.68,5014.21 4117.16,5029.21 4107.16,5029.21
  region net IMU-A_5: 4049.68,5014.21 4074.68,5014.21 4067.16,5029.21 4057.16,5029.21
  region net 3V3FB: 4531.93,3923.89 4531.93,3900.27 4567.36,3900.27 4567.36,3923.89
  region net U2_1: 4531.93,3840.17 4488.62,3825.47 4529.07,3801.78 4554.02,3810.25
  region net L1_1: 4425.62,3825.47 4382.32,3825.47 4392.21,3814.18 4415.83,3814.18
  region net L1_1: 4425.62,3849.09 4425.62,3825.47 4436.92,3825.47 4436.92,3849.09
  region net VIN: 4382.32,3862.87 4382.32,3886.49 4372.12,3886.49 4372.12,3862.87
  region net 3V3EN: 4382.32,3923.89 4425.62,3923.89 4418.93,3939.68 4395.31,3939.68
  region net 3V3: 5904.92,5143.7 5940.35,5143.7 5931.96,5164.68 5912.28,5164.68
  region net 3V3: 5937.38,5064.96 5907.86,5064.96 5916.71,5047.24 5928.53,5047.24
  region net EN: 5860.12,5143.7 5885.12,5143.7 5877.62,5158.7 5867.62,5158.7
  region net IO36: 5810.12,5143.7 5835.12,5143.7 5827.62,5149.18 5817.62,5149.18
  region net IO36: 5835.12,5064.96 5810.12,5064.96 5817.62,5049.96 5827.62,5049.96
  region net IO39: 5760.12,5143.7 5785.12,5143.7 5777.62,5158.7 5767.62,5158.7
  region net IO39: 5785.12,5064.96 5760.12,5064.96 5767.62,5049.96 5777.62,5049.96
  region net IO34: 5710.12,5143.7 5735.12,5143.7 5727.62,5144.18 5717.62,5144.18
  region net IO34: 5735.12,5064.96 5710.12,5064.96 5717.62,5049.96 5727.62,5049.96
  region net IO35: 5660.12,5143.7 5685.12,5143.7 5677.62,5154.18 5667.62,5154.18
  region net IO35: 5685.12,5064.96 5660.12,5064.96 5667.62,5055.68 5677.62,5055.68
  region net IO32: 5635.12,5064.96 5610.12,5064.96 5617.62,5049.96 5627.62,5049.96
  region net IO32: 5610.12,5143.7 5635.12,5143.7 5627.62,5158.7 5617.62,5158.7
  region net IO33: 5560.12,5143.7 5585.12,5143.7 5577.62,5158.7 5567.62,5158.7
  region net IO33: 5585.12,5064.96 5560.12,5064.96 5567.62,5049.96 5577.62,5049.96
  region net IO25: 5510.12,5143.7 5535.12,5143.7 5527.62,5158.7 5517.62,5158.7
  region net IO26: 5460.12,5143.7 5485.12,5143.7 5477.62,5158.7 5467.62,5158.7
  region net IO27: 5410.12,5143.7 5435.12,5143.7 5427.62,5158.7 5417.62,5158.7
  region net IO14: 5360.12,5143.7 5385.12,5143.7 5377.62,5158.7 5367.62,5158.7
  region net IO12: 5310.12,5143.7 5335.12,5143.7 5327.62,5158.7 5317.62,5158.7
  region net IO13: 5243.89,4940.41 5243.89,4962.4 5228.89,4974.98 5228.89,4960.84
  region net IO15: 5243.89,4579.92 5243.89,4609.45 5232.12,4600.59 5232.12,4588.78
  region net IO2: 5297.99,4526.96 5268.46,4526.96 5277.32,4509.25 5289.13,4509.25
  region net IO2: 5322.63,4559.45 5322.63,4529.92 5340.35,4538.78 5340.35,4550.59
  region net IO0: 5335.12,4395.67 5310.12,4395.67 5317.62,4380.67 5327.62,4380.67
  region net IO4: 5385.12,4395.67 5360.12,4395.67 5367.62,4380.67 5377.62,4380.67
  region net IO16: 5435.12,4395.67 5410.12,4395.67 5417.62,4380.67 5427.62,4380.67
  region net IO16: 5410.12,4474.41 5435.12,4474.41 5427.62,4476.98 5417.62,4476.98
  region net IO17: 5485.12,4395.67 5460.12,4395.67 5467.62,4380.67 5477.62,4380.67
  region net IO17: 5459.9,4474.41 5484.9,4474.41 5464.5,4489.41 5450.37,4489.41
  region net IO5: 5535.12,4395.67 5510.12,4395.67 5517.62,4380.67 5527.62,4380.67
  region net IO18: 5585.12,4395.67 5560.12,4395.67 5567.62,4380.67 5577.62,4380.67
  region net IO19: 5635.12,4395.67 5610.12,4395.67 5617.62,4380.67 5627.62,4380.67
  region net IO21: 5730.6,4395.67 5705.6,4395.67 5696.03,4380.67 5710.18,4380.67
  region net U0_RXD: 5785.12,4395.67 5760.12,4395.67 5767.62,4395.18 5777.62,4395.18
  region net U0_TXD: 5825.6,4395.67 5804.92,4395.67 5791.03,4380.67 5805.17,4380.67
  region net IO22: 5860.12,4474.41 5885.12,4474.41 5877.62,4479.18 5867.62,4479.18
  region net IO22: 5885.12,4395.67 5860.12,4395.67 5867.62,4390.18 5877.62,4390.18
  region net IO23: 5910.12,4474.41 5935.12,4474.41 5927.62,4489.18 5917.62,4489.18
  region net IO23: 5935.12,4395.67 5910.12,4395.67 5917.62,4380.67 5927.62,4380.67
  region net 3V3FB: 4610.12,3893.46 4610.12,3925.21 4574.68,3923.89 4574.68,3900.27
  region net 3V3FB: 4644.13,3925.21 4644.13,3893.46 4679.56,3897.57 4679.56,3921.19
  region net 3V3: 4610.12,3834.15 4644.13,3834.15 4638.93,3798.72 4615.31,3798.72
  region net 3V3FB: 4675.12,3925.21 4675.12,3893.46 4639.68,3897.57 4639.68,3921.19
  region net 3V3EN: 4149.13,4033.46 4149.13,4065.21 4184.56,4061.19 4184.56,4037.57
  region net VIN: 4204.13,3974.15 4170.12,3974.15 4175.31,3938.72 4198.93,3938.72
  region net VIN: 4204.13,4005.9 4204.13,3974.15 4237.42,3978.17 4237.42,4001.79
  region net 3V3EN: 4204.13,4033.46 4204.13,4065.21 4226.42,4060.99 4226.42,4037.37
  region net 3V3EN: 4170.12,4065.21 4170.12,4033.46 4134.68,4037.57 4134.68,4061.19
  region net R5_2: 6225.6,4722.18 6205.43,4736.95 6199.77,4722.5 6207.93,4716.53
  region net EN: 6134.86,4815.21 6164.39,4815.21 6155.53,4832.93 6143.72,4832.93
  region net 3V3: 6132.59,4737.96 6156.04,4755.9 6135.48,4762.48 6126.02,4755.24
  region net 3V3: 6156.21,4724.15 6132.59,4741.87 6125.97,4724.69 6135.51,4717.53
  region net L1_1: 4290.04,3729.72 4290.04,3670.67 4325.47,3718.93 4325.47,3752.33
  region net 3V3: 4465.23,3731.65 4465.23,3652.91 4507.12,3676.53 4507.12,3708.03
  region net IMU-A_4: 4124.64,5039.15 4099.64,5039.15 4107.17,5024.15 4117.17,5024.15
  region net IMU-A_5: 4074.64,5039.15 4049.64,5039.15 4057.17,5024.15 4067.17,5024.15
  region net IO13: 4074.62,5130.21 4049.62,5130.21 4057.12,5145.21 4067.12,5145.21
Bottom Layer:
  region net VIN: 3825.31,4052.16 3825.31,4093.5 3840.55,4084.64 3840.55,4061.02
  region net IO14: 4976.18,5696.75 5008,5664.93 4980.78,5662.46 4973.7,5669.53
  region net IO25: 5233.19,5556.92 5188.19,5556.92 5205.69,5535.92 5215.69,5535.92
  region net 3V3: 5589.9,5342.48 5621.66,5310.6 5600.62,5301.96 5581.18,5321.49
  region net IO22: 5778.73,4297.41 5733.73,4297.4 5751.22,4318.4 5761.22,4318.41
  region net 3V3: 5987.95,4957.5 5974.94,4970.39 5971.23,4962.03 5979.63,4953.72
  region net 3V3: 5922.89,5176.86 5909.94,5163.92 5903.41,5169.47 5917.33,5183.39
  region net 3V3: 5922.89,5176.86 5909.94,5163.92 5903.41,5169.47 5917.33,5183.39
  region net 3V3: 5894.05,5175.53 5894.05,5193.84 5887.02,5194.52 5887.02,5174.84
  region net 3V3: 5914.3,5185.45 5901.36,5172.5 5906.91,5165.97 5920.83,5179.89
  region net 3V3: 5914.3,5185.45 5901.36,5172.5 5906.91,5165.97 5920.83,5179.89
  region net 3V3: 5930.19,4555.53 5930.19,4573.84 5938.74,4570.59 5938.74,4558.78
  region net 3V3: 5914.05,4555.53 5914.05,4573.84 5909.32,4570.59 5909.32,4558.78
  region net 3V3: 5939.05,4555.53 5939.05,4573.84 5930.51,4570.59 5930.51,4558.78
  region net IO2: 5935.23,4760.53 5935.23,4778.84 5943.78,4774.68 5943.78,4764.68
  region net IO2: 6235.01,4824.43 6222.06,4837.38 6218.96,4828.4 6226.03,4821.33
  region net VIN: 4370.29,4081.41 4370.26,4099.72 4378.8,4102.39 4378.84,4078.77
  region net VIN: 4354.13,4081.4 4354.13,4099.7 4345.59,4102.36 4345.59,4078.74
  region net VIN: 4354.14,4099.71 4354.12,4081.41 4345.57,4078.76 4345.6,4102.38
  region net VIN: 4370.29,4081.41 4370.26,4099.72 4378.8,4102.39 4378.84,4078.77
  region net VIN: 4336.82,4081.4 4336.82,4099.7 4345.36,4102.36 4345.36,4078.74
  region net VIN: 4320.67,4081.4 4320.67,4099.7 4312.13,4102.37 4312.12,4078.74
  region net VIN: 4336.82,4081.41 4336.81,4099.71 4345.35,4102.38 4345.37,4078.76
  region net 3V3EN: 4399.05,3930.53 4399.05,3948.84 4390.51,3951.49 4390.51,3927.87
  region net 3V3EN: 4217.22,4041.14 4235.53,4041.14 4238.18,4032.59 4214.56,4032.59
  region net IO22: 5829.05,4360.53 5829.05,4378.84 5820.51,4374.68 5820.51,4364.68
  region net IO14: 4809.25,5632.57 4809.25,5650.88 4817.8,5646.72 4817.8,5636.72
  region net IO33: 5560.82,4984.93 5560.81,5003.24 5552.27,4999.08 5552.28,4989.08
  region net IO32: 5602.89,4952.5 5589.94,4965.45 5586.84,4956.47 5593.91,4949.4
  region net IO23: 5762.89,4571.86 5749.94,4558.92 5746.84,4567.9 5753.91,4574.97
  region net IO22: 5729.05,4525.53 5729.05,4543.84 5720.51,4539.68 5720.51,4529.68
  region net VIN: 5159.3,4795.05 5146.35,4782.11 5153.99,4777.67 5163.74,4787.41
  region net 3V3: 4974.66,4757.27 4962.26,4743.81 4955.51,4749.08 4968.85,4763.57
  region net VIN: 3814.27,6023.81 3795.96,6023.82 3793.3,6032.36 3816.93,6032.36
  region net VIN: 3814.27,6007.67 3795.96,6007.67 3793.3,5999.12 3816.93,5999.13
  region net VIN: 3814.27,5998.22 3795.96,5998.23 3793.3,6006.77 3816.93,6006.77
  region net VIN: 3814.27,5982.08 3795.96,5982.08 3793.3,5973.54 3816.93,5973.54
  region net IO27: 4443.28,5581.47 4430.34,5568.52 4439.32,5565.42 4446.39,5572.49
  region net IO27: 5040.09,5572.46 5027.18,5585.45 5024.05,5576.48 5031.1,5569.39
  region net BLC: 4800.98,5589.27 4800.98,5607.58 4792.44,5610.23 4792.44,5586.61
  region net BLB: 4859.03,5323.2 4846.08,5310.26 4838.16,5314.42 4854.86,5331.12
  region net BLA: 4819.72,5291.67 4808.95,5276.87 4800.39,5279.63 4814.46,5298.97
  region net BLA: 4593.16,5516.51 4580.22,5503.56 4584.38,5495.64 4601.08,5512.35
  region net BLB: 4665.72,5516.51 4652.78,5503.56 4656.94,5495.64 4673.64,5512.34
  region net BLC: 4718.87,5658.24 4705.93,5645.29 4710.09,5637.37 4726.79,5654.07
  region net IO17: 5189.18,4609.54 5189.17,4591.23 5197.71,4595.38 5197.72,4605.38
  region net IO16: 5163.59,4567.62 5163.58,4585.93 5172.13,4581.77 5172.13,4571.77
  region net IO16: 5410.21,4502.33 5397.26,4489.39 5394.16,4498.37 5401.23,4505.44
  region net IO17: 5431.87,4527.92 5418.92,4514.98 5415.82,4523.96 5422.89,4531.03
  region net IO36: 5935.77,4960.43 5954.07,4960.43 5949.92,4954.68 5939.92,4954.68
  region net IO39: 5858.39,4871.65 5875.05,4879.25 5868.17,4885.5 5858.17,4880.94
  region net IO34: 5843.86,4693.86 5836.13,4677.27 5845.49,4677.13 5849.98,4686.78
  region net IO35: 5840.77,4644.41 5840.72,4662.72 5848.21,4658.58 5848.23,4648.58
  region net VIN: 3814.27,6033.26 3795.96,6033.26 3793.3,6024.71 3816.93,6024.72
  region net VIN: 4383.83,4081.43 4383.83,4099.74 4375.29,4102.39 4375.29,4078.77
  region net VIN: 4399.98,4081.43 4399.98,4099.74 4408.52,4102.39 4408.52,4078.77
  region net VIN: 4383.83,4081.43 4383.83,4099.73 4375.28,4102.39 4375.29,4078.77
  region net U1_1: 5744.32,4907.68 5769.32,4907.68 5761.82,4892.68 5751.82,4892.68
  region net 3V3: 5681.59,4907.68 5713.34,4941.69 5677.6,4963.98 5658.79,4943.83
  region net VIN: 5379.8,4717.4 5405.31,4694.24 5412.67,4715.48 5402.45,4724.76
  region net VIN: 5373.81,4717.4 5373.81,4681.96 5338.38,4687.87 5338.38,4711.49
  region net U1_11: 5448.26,4717.4 5460.43,4695.56 5466.89,4714.78 5461.83,4723.86
  region net U1_14: 5474.84,4794.58 5474.84,4819.58 5489.84,4812.08 5489.84,4802.08
  region net MX_M+: 5841.1,4925.97 5832.75,4934.32 5823.59,4923.92 5830.66,4916.85
  region net IO36: 5924.62,4942.67 5932.97,4934.32 5942.9,4945.59 5935.84,4952.67
  region net IO34: 5874.5,4646.8 5882.86,4655.15 5871.61,4665.12 5864.54,4658.05
  region net IO35: 5860.58,4632.88 5868.94,4641.23 5857.68,4651.19 5850.61,4644.12
  region net MY_M+: 5832.75,4605.04 5841.1,4613.4 5829.88,4623.39 5822.81,4616.32
  region net VIN: 5356.8,4753.93 5391.25,4753.93 5380.91,4733.26 5367.13,4733.26
  region net VIN: 5346.45,4794.81 5346.45,4760.36 5325.78,4770.69 5325.78,4784.47
  region net 3V3: 5183.62,5402.68 5183.15,5449.09 5159.21,5408.49 5169.59,5379.77
  region net IO25: 5148.12,5486.78 5164.87,5468.65 5174.72,5480.1 5167.92,5487.46
  region net U1_1: 5744.32,4866.14 5769.32,4866.14 5761.82,4881.14 5751.82,4881.14
  region net MX_M+: 5778.55,4826.77 5778.53,4840.55 5791.11,4838.68 5791.13,4828.68
  region net MX_M-: 5778.55,4775.58 5778.54,4789.36 5796.26,4788.39 5796.26,4776.58
  region net MY_M-: 5778.54,4749.99 5778.54,4763.77 5796.26,4762.79 5796.26,4750.98
  region net MY_M+: 5778.56,4712.59 5778.53,4698.81 5788.41,4700.68 5788.43,4710.68
  region net IO32: 5524.62,4866.14 5549.62,4866.14 5542.12,4881.14 5532.12,4881.14
  region net IO33: 5517.46,4840.51 5516,4826.81 5506.59,4829.68 5507.65,4839.68
  region net U1_14: 5517.19,4801.2 5516.28,4814.95 5501.43,4812.08 5502.1,4802.08
  region net VIN: 5516.73,4749.99 5516.73,4763.77 5496.06,4763.77 5496.06,4749.99
  region net U1_11: 5516.74,4724.4 5516.73,4738.18 5501.73,4736.28 5501.73,4726.28
  region net IO22: 5516.74,4698.81 5516.72,4712.59 5503.12,4710.68 5503.13,4700.68
  region net IO23: 5554.78,4673.25 5529.78,4673.22 5550.21,4658.22 5564.35,4658.22